# EAGLE board Qwiic_RFID_Tag-Panel (EAGLE 9.6.2)
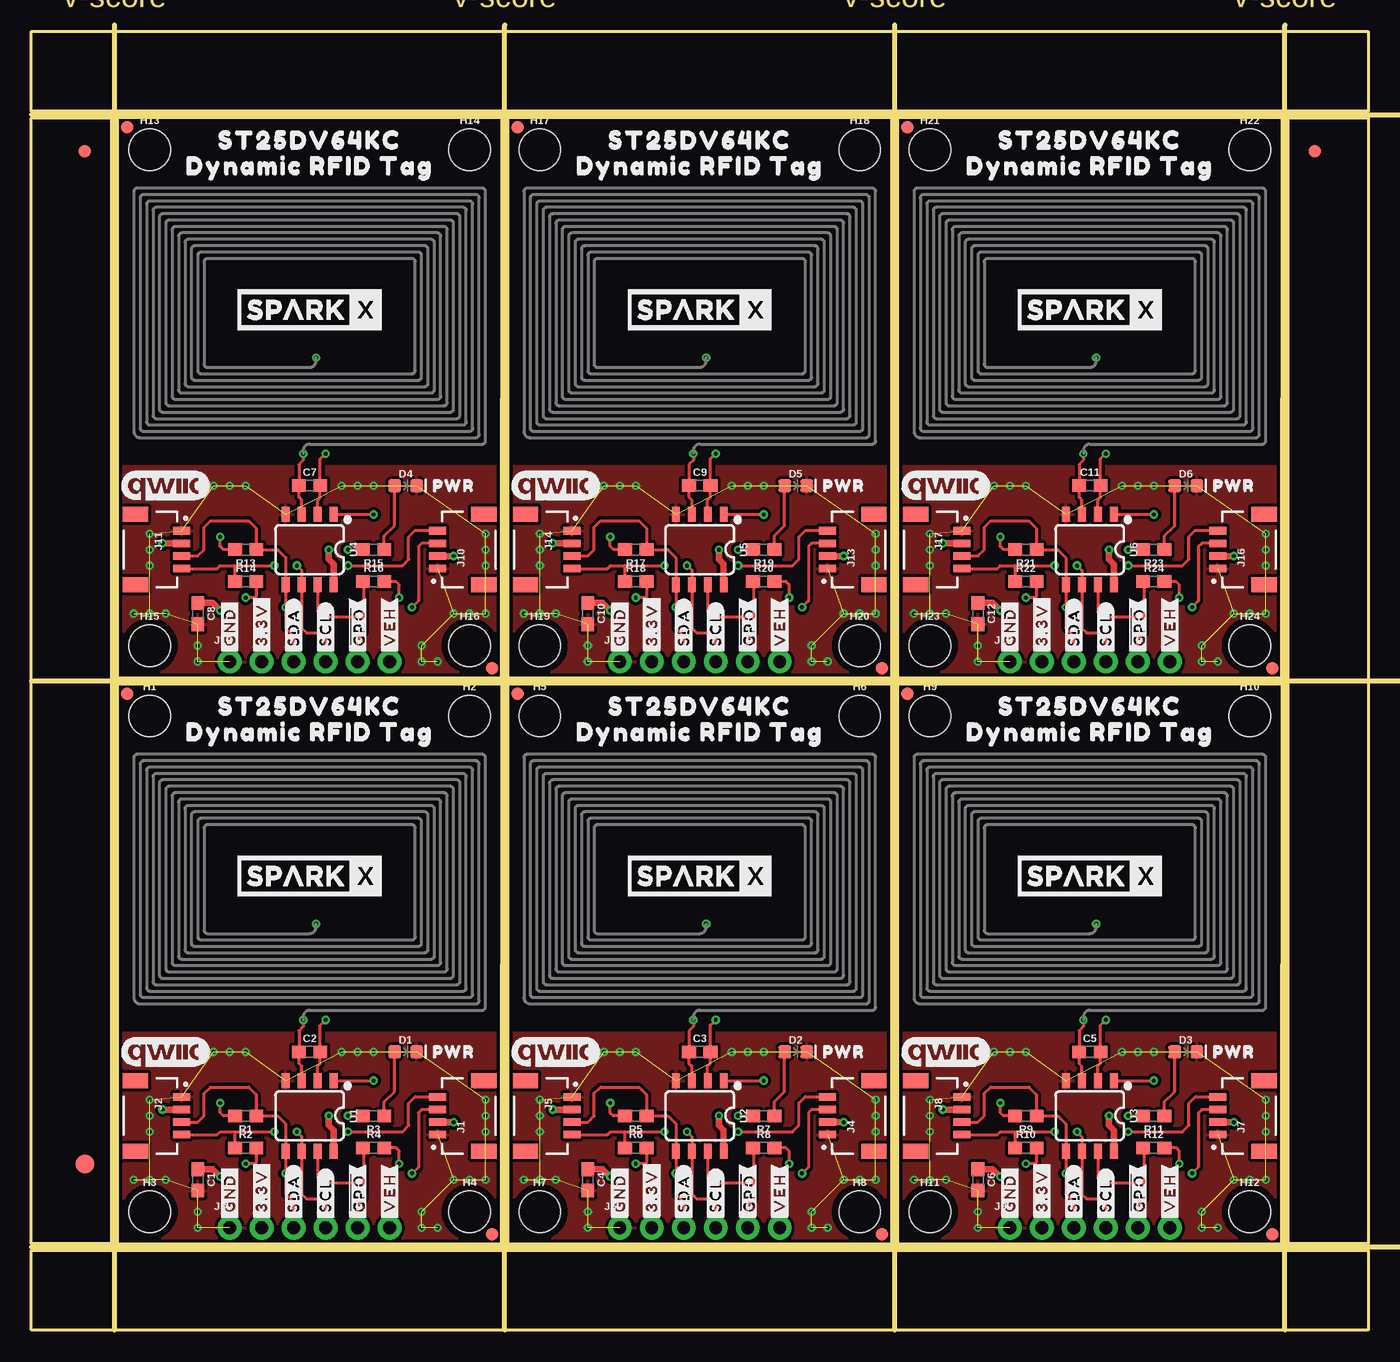
[diagram p0: board, top side]
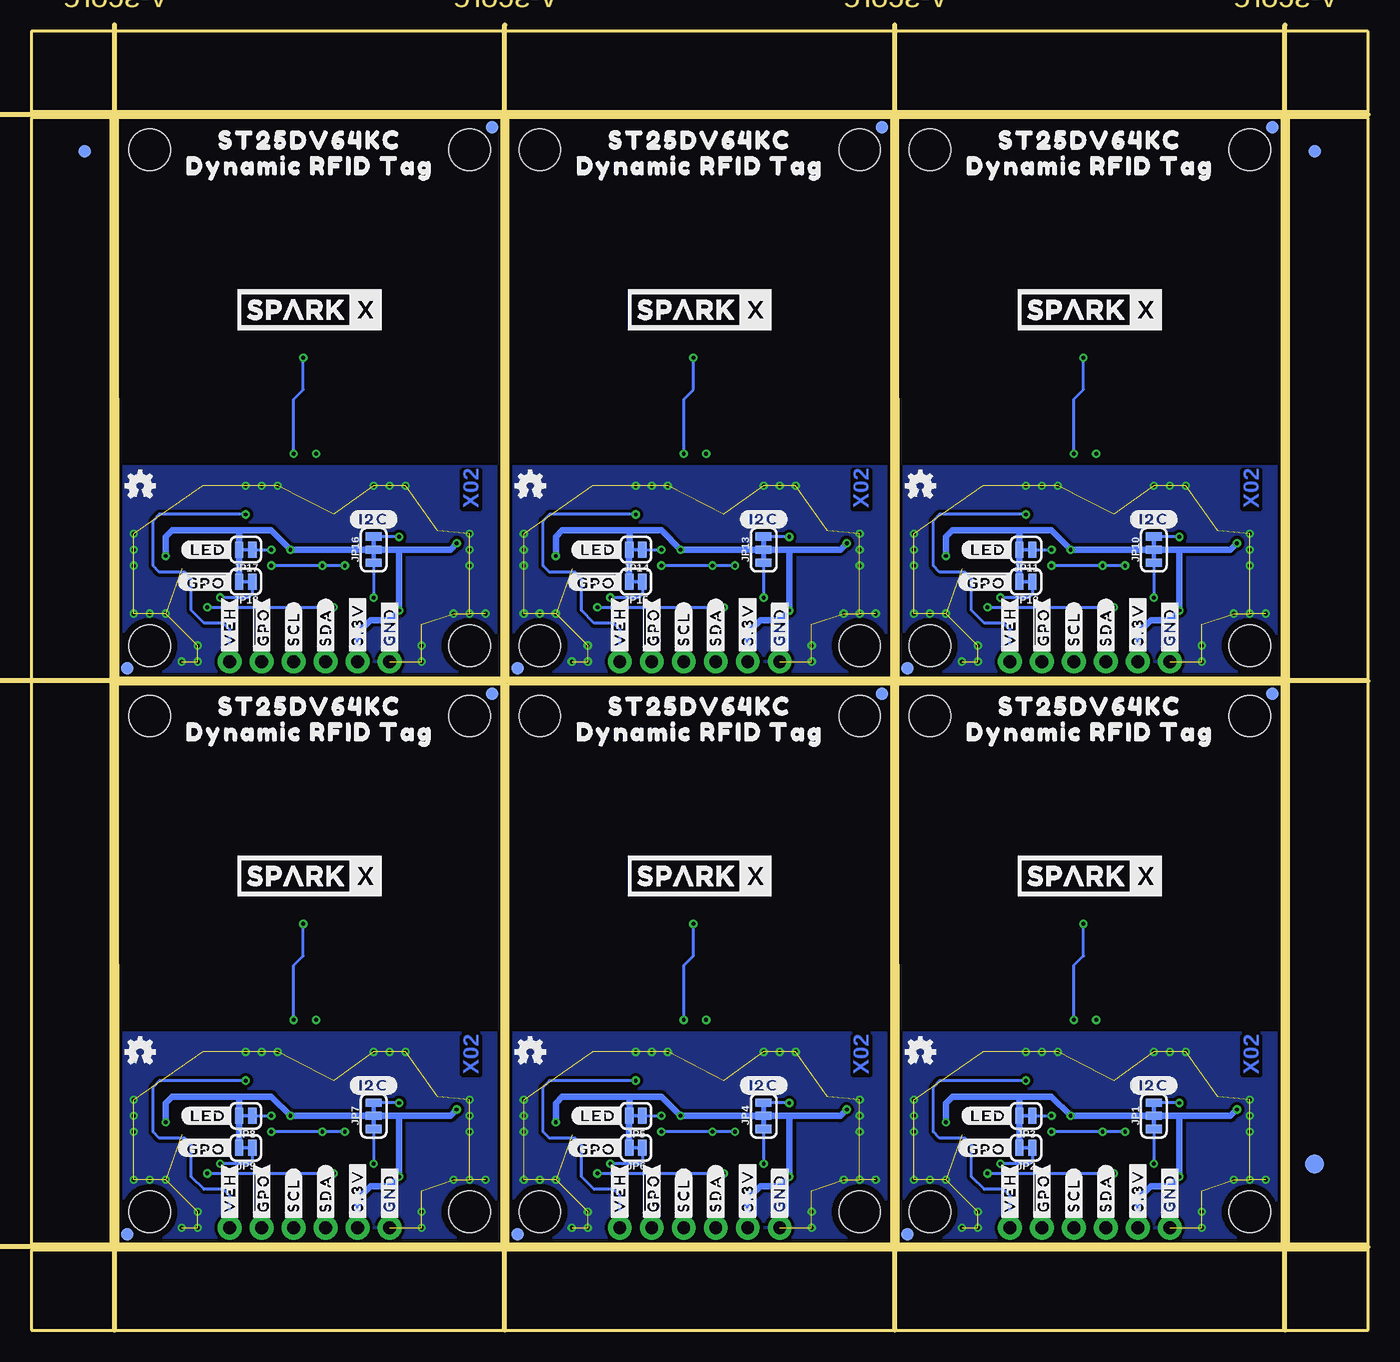
[diagram p1: board, bottom side, seen from below]

Size 106.17 x 103.12 mm. Coordinates in mm from the lower left corner, seen from the top.
Outline: 6.86,6.86 37.32,6.86 37.34,51.31 6.86,51.31 6.86,6.86
Outline: 37.85,6.86 68.31,6.86 68.33,51.31 37.85,51.31 37.85,6.86
Outline: 68.83,6.86 99.29,6.86 99.31,51.31 68.83,51.31 68.83,6.86
Outline: 6.86,51.82 37.32,51.82 37.34,96.27 6.86,96.27 6.86,51.82
Outline: 37.85,51.82 68.31,51.82 68.33,96.27 37.85,96.27 37.85,51.82
Outline: 68.83,51.82 99.29,51.82 99.31,96.27 68.83,96.27 68.83,51.82
Outline: 0,6.35 106.17,6.35 106.17,0 0,0 0,6.35
Outline: 99.82,96.27 106.17,96.27 106.17,6.86 99.82,6.86 99.82,96.27
Outline: 0,103.12 106.17,103.12 106.17,96.77 0,96.77 0,103.12
Outline: 0,96.27 6.35,96.27 6.35,6.86 0,6.86 0,96.27
Copper layers (1*16): Top 0.035mm / dielectric 1.5mm / Bottom 0.035mm
Design rules "Qwiic_RFID_Tag": minimum track width 7mil, minimum drill 0.3mm, track to track 7mil, track to pad 7mil, pad to pad 7mil, via to via 7mil, smd to smd 7mil, copper to edge 7mil, drill to drill 7mil, minimum pad ring 7mil, minimum via ring 7mil, stop-mask expansion 4mil, vias tented up to drill 25mil, thermal gap 10mil
Milling: 7 lines

## Footprints (pad centres in the part's own frame; a part is rotated, then mirrored left to right if it is on the bottom)
0603 = smd 1.1 x 1: 1 -0.85,0; 2 0.85,0
LED-0603 = smd 1 x 1: A -0.877,0; C 0.877,0
FIDUCIAL-1X2 = smd 1 x 1: 1 0,0
FIDUCIAL-1.5X3 = smd 1.5 x 1.5: 1 0,0
STAND-OFF = hole 3.302: 0,0
JST04_1MM_RA = smd 0.6 x 1.35: 1 -1.5,0; 2 -0.5,0; 3 0.5,0; 4 1.5,0 | smd 1.2 x 2: NC1 2.8,-3.675; NC2 -2.8,-3.675
1X06_NO_SILK = drill 1.016 pad 1.88: 1 0,0; 2 2.54,0; 3 5.08,0; 4 7.62,0; 5 10.16,0; 6 12.7,0
SMT-JUMPER_3_2-NC_TRACE_SILK = smd 0.66 x 1.27: 1 -1.041,0; 2 0,0; 3 1.041,0
SMT-JUMPER_2_NC_TRACE_SILK = smd 0.66 x 1.27: 1 -0.521,0; 2 0.521,0
PCB_4UH_INDUCTOR = drill 0.305 pad 0.61: IN1 0.508,7.62; IN2 -0.508,0
SO08 = smd 0.6 x 1.2: 1 -1.905,-2.8; 2 -0.635,-2.8; 3 0.635,-2.8; 4 1.905,-2.8; 5 1.905,2.8; 6 0.635,2.8; 7 -0.635,2.8; 8 -1.905,2.8

## Placement (x,y rotation side)
C1  0.1uF  [0603]  13.21,11.94 270 top
C2  4.7pF  [0603]  22.1,22.1 0 top
C3  4.7pF  [0603]  53.09,22.1 0 top
C4  0.1uF  [0603]  44.2,11.94 270 top
C5  4.7pF  [0603]  84.07,22.1 0 top
C6  0.1uF  [0603]  75.18,11.94 270 top
C7  4.7pF  [0603]  22.1,67.06 0 top
C8  0.1uF  [0603]  13.21,56.9 270 top
C9  4.7pF  [0603]  53.09,67.06 0 top
C10  0.1uF  [0603]  44.2,56.9 270 top
C11  4.7pF  [0603]  84.07,67.06 0 top
C12  0.1uF  [0603]  75.18,56.9 270 top
D1  RED  [LED-0603]  29.72,22.1 0 top
D2  RED  [LED-0603]  60.71,22.1 0 top
D3  RED  [LED-0603]  91.69,22.1 0 top
D4  RED  [LED-0603]  29.72,67.06 0 top
D5  RED  [LED-0603]  60.71,67.06 0 top
D6  RED  [LED-0603]  91.69,67.06 0 top
E$1  [FIDUCIAL-1X2]  4.23,93.6 0 top
E$2  [FIDUCIAL-1X2]  4.23,93.6 0 bottom
E$3  [FIDUCIAL-1X2]  101.94,93.6 0 top
E$4  [FIDUCIAL-1X2]  101.94,93.6 0 bottom
E$5  [FIDUCIAL-1.5X3]  4.23,13.21 0 top
E$6  [FIDUCIAL-1.5X3]  4.23,13.21 0 bottom
FD1  FIDUCIAL1X2  [FIDUCIAL-1X2]  7.62,50.55 0 bottom
FD2  FIDUCIAL1X2  [FIDUCIAL-1X2]  7.62,50.55 0 top
FD3  FIDUCIAL1X2  [FIDUCIAL-1X2]  36.58,7.62 0 bottom
FD4  FIDUCIAL1X2  [FIDUCIAL-1X2]  36.58,7.62 0 top
FD5  FIDUCIAL1X2  [FIDUCIAL-1X2]  38.61,50.55 0 bottom
FD6  FIDUCIAL1X2  [FIDUCIAL-1X2]  38.61,50.55 0 top
FD7  FIDUCIAL1X2  [FIDUCIAL-1X2]  67.56,7.62 0 bottom
FD8  FIDUCIAL1X2  [FIDUCIAL-1X2]  67.56,7.62 0 top
FD9  FIDUCIAL1X2  [FIDUCIAL-1X2]  69.6,50.55 0 bottom
FD10  FIDUCIAL1X2  [FIDUCIAL-1X2]  69.6,50.55 0 top
FD11  FIDUCIAL1X2  [FIDUCIAL-1X2]  98.55,7.62 0 bottom
FD12  FIDUCIAL1X2  [FIDUCIAL-1X2]  98.55,7.62 0 top
FD13  FIDUCIAL1X2  [FIDUCIAL-1X2]  7.62,95.5 0 bottom
FD14  FIDUCIAL1X2  [FIDUCIAL-1X2]  7.62,95.5 0 top
FD15  FIDUCIAL1X2  [FIDUCIAL-1X2]  36.58,52.58 0 bottom
FD16  FIDUCIAL1X2  [FIDUCIAL-1X2]  36.58,52.58 0 top
FD17  FIDUCIAL1X2  [FIDUCIAL-1X2]  38.61,95.5 0 bottom
FD18  FIDUCIAL1X2  [FIDUCIAL-1X2]  38.61,95.5 0 top
FD19  FIDUCIAL1X2  [FIDUCIAL-1X2]  67.56,52.58 0 bottom
FD20  FIDUCIAL1X2  [FIDUCIAL-1X2]  67.56,52.58 0 top
FD21  FIDUCIAL1X2  [FIDUCIAL-1X2]  69.6,95.5 0 bottom
FD22  FIDUCIAL1X2  [FIDUCIAL-1X2]  69.6,95.5 0 top
FD23  FIDUCIAL1X2  [FIDUCIAL-1X2]  98.55,52.58 0 bottom
FD24  FIDUCIAL1X2  [FIDUCIAL-1X2]  98.55,52.58 0 top
FRAME1  FRAME-LETTERNO_PACKAGE  [DUMMY]  6.86,6.86 0 top
FRAME2  FRAME-LETTERNO_PACKAGE  [DUMMY]  37.85,6.86 0 top
FRAME3  FRAME-LETTERNO_PACKAGE  [DUMMY]  68.83,6.86 0 top
FRAME4  FRAME-LETTERNO_PACKAGE  [DUMMY]  6.86,51.82 0 top
FRAME5  FRAME-LETTERNO_PACKAGE  [DUMMY]  37.85,51.82 0 top
FRAME6  FRAME-LETTERNO_PACKAGE  [DUMMY]  68.83,51.82 0 top
H1  STAND-OFF  [STAND-OFF]  9.4,48.77 0 top
H2  STAND-OFF  [STAND-OFF]  34.8,48.77 0 top
H3  STAND-OFF  [STAND-OFF]  9.4,9.4 0 top
H4  STAND-OFF  [STAND-OFF]  34.8,9.4 0 top
H5  STAND-OFF  [STAND-OFF]  40.39,48.77 0 top
H6  STAND-OFF  [STAND-OFF]  65.79,48.77 0 top
H7  STAND-OFF  [STAND-OFF]  40.39,9.4 0 top
H8  STAND-OFF  [STAND-OFF]  65.79,9.4 0 top
H9  STAND-OFF  [STAND-OFF]  71.37,48.77 0 top
H10  STAND-OFF  [STAND-OFF]  96.77,48.77 0 top
H11  STAND-OFF  [STAND-OFF]  71.37,9.4 0 top
H12  STAND-OFF  [STAND-OFF]  96.77,9.4 0 top
H13  STAND-OFF  [STAND-OFF]  9.4,93.73 0 top
H14  STAND-OFF  [STAND-OFF]  34.8,93.73 0 top
H15  STAND-OFF  [STAND-OFF]  9.4,54.36 0 top
H16  STAND-OFF  [STAND-OFF]  34.8,54.36 0 top
H17  STAND-OFF  [STAND-OFF]  40.39,93.73 0 top
H18  STAND-OFF  [STAND-OFF]  65.79,93.73 0 top
H19  STAND-OFF  [STAND-OFF]  40.39,54.36 0 top
H20  STAND-OFF  [STAND-OFF]  65.79,54.36 0 top
H21  STAND-OFF  [STAND-OFF]  71.37,93.73 0 top
H22  STAND-OFF  [STAND-OFF]  96.77,93.73 0 top
H23  STAND-OFF  [STAND-OFF]  71.37,54.36 0 top
H24  STAND-OFF  [STAND-OFF]  96.77,54.36 0 top
J1  Qwiic  [JST04_1MM_RA]  32.26,17.02 90 top
J2  Qwiic  [JST04_1MM_RA]  11.94,17.02 270 top
J3  [1X06_NO_SILK]  15.75,8.13 0 top
J4  Qwiic  [JST04_1MM_RA]  63.25,17.02 90 top
J5  Qwiic  [JST04_1MM_RA]  42.93,17.02 270 top
J6  [1X06_NO_SILK]  46.74,8.13 0 top
J7  Qwiic  [JST04_1MM_RA]  94.23,17.02 90 top
J8  Qwiic  [JST04_1MM_RA]  73.91,17.02 270 top
J9  [1X06_NO_SILK]  77.72,8.13 0 top
J10  Qwiic  [JST04_1MM_RA]  32.26,61.98 90 top
J11  Qwiic  [JST04_1MM_RA]  11.94,61.98 270 top
J12  [1X06_NO_SILK]  15.75,53.09 0 top
J13  Qwiic  [JST04_1MM_RA]  63.25,61.98 90 top
J14  Qwiic  [JST04_1MM_RA]  42.93,61.98 270 top
J15  [1X06_NO_SILK]  46.74,53.09 0 top
J16  Qwiic  [JST04_1MM_RA]  94.23,61.98 90 top
J17  Qwiic  [JST04_1MM_RA]  73.91,61.98 270 top
J18  [1X06_NO_SILK]  77.72,53.09 0 top
JP1  JUMPER-SMT_3_2-NC_TRACE_SILK  [SMT-JUMPER_3_2-NC_TRACE_SILK]  17.02,17.02 90 bottom
JP2  JUMPER-SMT_2_NC_TRACE_SILK  [SMT-JUMPER_2_NC_TRACE_SILK]  27.18,14.48 180 bottom
JP3  JUMPER-SMT_2_NC_TRACE_SILK  [SMT-JUMPER_2_NC_TRACE_SILK]  27.18,17.02 180 bottom
JP4  JUMPER-SMT_3_2-NC_TRACE_SILK  [SMT-JUMPER_3_2-NC_TRACE_SILK]  48.01,17.02 90 bottom
JP5  JUMPER-SMT_2_NC_TRACE_SILK  [SMT-JUMPER_2_NC_TRACE_SILK]  58.17,17.02 180 bottom
JP6  JUMPER-SMT_2_NC_TRACE_SILK  [SMT-JUMPER_2_NC_TRACE_SILK]  58.17,14.48 180 bottom
JP7  JUMPER-SMT_3_2-NC_TRACE_SILK  [SMT-JUMPER_3_2-NC_TRACE_SILK]  78.99,17.02 90 bottom
JP8  JUMPER-SMT_2_NC_TRACE_SILK  [SMT-JUMPER_2_NC_TRACE_SILK]  89.15,17.02 180 bottom
JP9  JUMPER-SMT_2_NC_TRACE_SILK  [SMT-JUMPER_2_NC_TRACE_SILK]  89.15,14.48 180 bottom
JP10  JUMPER-SMT_3_2-NC_TRACE_SILK  [SMT-JUMPER_3_2-NC_TRACE_SILK]  17.02,61.98 90 bottom
JP11  JUMPER-SMT_2_NC_TRACE_SILK  [SMT-JUMPER_2_NC_TRACE_SILK]  27.18,61.98 180 bottom
JP12  JUMPER-SMT_2_NC_TRACE_SILK  [SMT-JUMPER_2_NC_TRACE_SILK]  27.18,59.44 180 bottom
JP13  JUMPER-SMT_3_2-NC_TRACE_SILK  [SMT-JUMPER_3_2-NC_TRACE_SILK]  48.01,61.98 90 bottom
JP14  JUMPER-SMT_2_NC_TRACE_SILK  [SMT-JUMPER_2_NC_TRACE_SILK]  58.17,61.98 180 bottom
JP15  JUMPER-SMT_2_NC_TRACE_SILK  [SMT-JUMPER_2_NC_TRACE_SILK]  58.17,59.44 180 bottom
JP16  JUMPER-SMT_3_2-NC_TRACE_SILK  [SMT-JUMPER_3_2-NC_TRACE_SILK]  78.99,61.98 90 bottom
JP17  JUMPER-SMT_2_NC_TRACE_SILK  [SMT-JUMPER_2_NC_TRACE_SILK]  89.15,61.98 180 bottom
JP18  JUMPER-SMT_2_NC_TRACE_SILK  [SMT-JUMPER_2_NC_TRACE_SILK]  89.15,59.44 180 bottom
L1  PCB_4UH_INDUCTOR  [PCB_4UH_INDUCTOR]  22.1,24.64 0 top
L2  PCB_4UH_INDUCTOR  [PCB_4UH_INDUCTOR]  53.09,24.64 0 top
L3  PCB_4UH_INDUCTOR  [PCB_4UH_INDUCTOR]  84.07,24.64 0 top
L4  PCB_4UH_INDUCTOR  [PCB_4UH_INDUCTOR]  22.1,69.6 0 top
L5  PCB_4UH_INDUCTOR  [PCB_4UH_INDUCTOR]  53.09,69.6 0 top
L6  PCB_4UH_INDUCTOR  [PCB_4UH_INDUCTOR]  84.07,69.6 0 top
LOGO1  OSHW-LOGOMINI  [OSHW-LOGO-MINI]  35.56,22.1 0 bottom
LOGO2  OSHW-LOGOMINI  [OSHW-LOGO-MINI]  66.55,22.1 0 bottom
LOGO3  QWIIC_LOGO_7MM  [QWIIC_7MM]  10.67,22.1 0 top
LOGO4  QWIIC_LOGO_7MM  [QWIIC_7MM]  41.66,22.1 0 top
LOGO5  OSHW-LOGOMINI  [OSHW-LOGO-MINI]  97.54,22.1 0 bottom
LOGO6  QWIIC_LOGO_7MM  [QWIIC_7MM]  72.64,22.1 0 top
LOGO7  OSHW-LOGOMINI  [OSHW-LOGO-MINI]  35.56,67.06 0 bottom
LOGO8  QWIIC_LOGO_7MM  [QWIIC_7MM]  10.67,67.06 0 top
LOGO9  OSHW-LOGOMINI  [OSHW-LOGO-MINI]  66.55,67.06 0 bottom
LOGO10  QWIIC_LOGO_7MM  [QWIIC_7MM]  41.66,67.06 0 top
LOGO11  OSHW-LOGOMINI  [OSHW-LOGO-MINI]  97.54,67.06 0 bottom
LOGO12  QWIIC_LOGO_7MM  [QWIIC_7MM]  72.64,67.06 0 top
R1  2.2k  [0603]  17.02,17.02 180 top
R2  2.2k  [0603]  17.02,14.48 0 top
R3  1k  [0603]  27.18,17.02 180 top
R4  10k  [0603]  27.18,14.48 0 top
R5  2.2k  [0603]  48.01,17.02 180 top
R6  2.2k  [0603]  48.01,14.48 0 top
R7  1k  [0603]  58.17,17.02 180 top
R8  10k  [0603]  58.17,14.48 0 top
R9  2.2k  [0603]  78.99,17.02 180 top
R10  2.2k  [0603]  78.99,14.48 0 top
R11  1k  [0603]  89.15,17.02 180 top
R12  10k  [0603]  89.15,14.48 0 top
R13  2.2k  [0603]  17.02,61.98 180 top
R14  2.2k  [0603]  17.02,59.44 0 top
R15  1k  [0603]  27.18,61.98 180 top
R16  10k  [0603]  27.18,59.44 0 top
R17  2.2k  [0603]  48.01,61.98 180 top
R18  2.2k  [0603]  48.01,59.44 0 top
R19  1k  [0603]  58.17,61.98 180 top
R20  10k  [0603]  58.17,59.44 0 top
R21  2.2k  [0603]  78.99,61.98 180 top
R22  2.2k  [0603]  78.99,59.44 0 top
R23  1k  [0603]  89.15,61.98 180 top
R24  10k  [0603]  89.15,59.44 0 top
U1  ST25DV64KC  [SO08]  22.1,17.02 180 top
U2  ST25DV64KC  [SO08]  53.09,17.02 180 top
U3  ST25DV64KC  [SO08]  84.07,17.02 180 top
U4  ST25DV64KC  [SO08]  22.1,61.98 180 top
U5  ST25DV64KC  [SO08]  53.09,61.98 180 top
U6  ST25DV64KC  [SO08]  84.07,61.98 180 top
U$1  SPARKX-LOGO5  [SPARKX-LARGE]  22.1,36.07 0 top
U$2  SPARKX-LOGO5  [SPARKX-LARGE]  22.1,36.07 0 bottom
U$3  [#3#3V#0]  18.29,8.64 90 top
U$4  [#GND#4]  15.75,8.64 90 top
U$5  [#SDA#5]  20.83,8.64 90 top
U$6  [#SCL#6]  23.37,8.64 90 top
U$7  [##GPO##8]  25.91,8.64 90 top
U$8  [#VEH#7]  28.45,8.64 90 top
U$9  [PWR11]  33.53,22.1 0 top
U$10  [DYNAMIC_RFID_TAG0]  22.1,47.5 0 top
U$11  [DYNAMIC_RFID_TAG0]  22.1,47.5 0 bottom
U$12  SPARKX-LOGO5  [SPARKX-LARGE]  53.09,36.07 0 top
U$13  [ST25DV64KC5984]  22.1,49.53 0 top
U$14  SPARKX-LOGO5  [SPARKX-LARGE]  53.09,36.07 0 bottom
U$15  [#I2C#11]  17.02,19.43 0 bottom
U$16  [##GPO##9]  28.07,14.48 0 bottom
U$17  [#LED#10]  28.07,17.02 0 bottom
U$18  [#GND#4]  15.75,8.64 90 bottom
U$19  [#3#3V#0]  18.29,8.64 90 bottom
U$20  [#SDA#5]  20.83,8.64 90 bottom
U$21  [#SCL#6]  23.37,8.64 90 bottom
U$22  [##GPO##8]  25.91,8.64 90 bottom
U$23  [#VEH#7]  28.45,8.64 90 bottom
U$24  [ST25DV64KC5984]  22.1,49.53 0 bottom
U$25  [#3#3V#0]  49.28,8.64 90 top
U$26  [#GND#4]  46.74,8.64 90 top
U$27  [#SDA#5]  51.82,8.64 90 top
U$28  [#SCL#6]  54.36,8.64 90 top
U$29  [##GPO##8]  56.9,8.64 90 top
U$30  [#VEH#7]  59.44,8.64 90 top
U$31  [PWR11]  64.52,22.1 0 top
U$32  [#I2C#11]  48.01,19.43 0 bottom
U$33  [##GPO##9]  59.05,14.48 0 bottom
U$34  [#LED#10]  59.05,17.02 0 bottom
U$35  [#GND#4]  46.74,8.64 90 bottom
U$36  [#3#3V#0]  49.28,8.64 90 bottom
U$37  [#SDA#5]  51.82,8.64 90 bottom
U$38  [#SCL#6]  54.36,8.64 90 bottom
U$39  [##GPO##8]  56.9,8.64 90 bottom
U$40  [#VEH#7]  59.44,8.64 90 bottom
U$41  [ST25DV64KC5984]  53.09,49.53 0 top
U$42  [ST25DV64KC5984]  53.09,49.53 0 bottom
U$43  [DYNAMIC_RFID_TAG0]  53.09,47.5 0 top
U$44  [DYNAMIC_RFID_TAG0]  53.09,47.5 0 bottom
U$45  SPARKX-LOGO5  [SPARKX-LARGE]  84.07,36.07 0 top
U$46  SPARKX-LOGO5  [SPARKX-LARGE]  84.07,36.07 0 bottom
U$47  [#3#3V#0]  80.26,8.64 90 top
U$48  [#GND#4]  77.72,8.64 90 top
U$49  [#SDA#5]  82.8,8.64 90 top
U$50  [#SCL#6]  85.34,8.64 90 top
U$51  [##GPO##8]  87.88,8.64 90 top
U$52  [#VEH#7]  90.42,8.64 90 top
U$53  [PWR11]  95.5,22.1 0 top
U$54  [#I2C#11]  78.99,19.43 0 bottom
U$55  [##GPO##9]  90.04,14.48 0 bottom
U$56  [#LED#10]  90.04,17.02 0 bottom
U$57  [#GND#4]  77.72,8.64 90 bottom
U$58  [#3#3V#0]  80.26,8.64 90 bottom
U$59  [#SDA#5]  82.8,8.64 90 bottom
U$60  [#SCL#6]  85.34,8.64 90 bottom
U$61  [##GPO##8]  87.88,8.64 90 bottom
U$62  [#VEH#7]  90.42,8.64 90 bottom
U$63  [ST25DV64KC5984]  84.07,49.53 0 top
U$64  [ST25DV64KC5984]  84.07,49.53 0 bottom
U$65  [DYNAMIC_RFID_TAG0]  84.07,47.5 0 top
U$66  [DYNAMIC_RFID_TAG0]  84.07,47.5 0 bottom
U$67  SPARKX-LOGO5  [SPARKX-LARGE]  22.1,81.03 0 top
U$68  SPARKX-LOGO5  [SPARKX-LARGE]  22.1,81.03 0 bottom
U$69  [#3#3V#0]  18.29,53.59 90 top
U$70  [#GND#4]  15.75,53.59 90 top
U$71  [#SDA#5]  20.83,53.59 90 top
U$72  [#SCL#6]  23.37,53.59 90 top
U$73  [##GPO##8]  25.91,53.59 90 top
U$74  [#VEH#7]  28.45,53.59 90 top
U$75  [PWR11]  33.53,67.06 0 top
U$76  [#I2C#11]  17.02,64.39 0 bottom
U$77  [##GPO##9]  28.07,59.44 0 bottom
U$78  [#LED#10]  28.07,61.98 0 bottom
U$79  [#GND#4]  15.75,53.59 90 bottom
U$80  [#3#3V#0]  18.29,53.59 90 bottom
U$81  [#SDA#5]  20.83,53.59 90 bottom
U$82  [#SCL#6]  23.37,53.59 90 bottom
U$83  [##GPO##8]  25.91,53.59 90 bottom
U$84  [#VEH#7]  28.45,53.59 90 bottom
U$85  [ST25DV64KC5984]  22.1,94.49 0 top
U$86  [ST25DV64KC5984]  22.1,94.49 0 bottom
U$87  [DYNAMIC_RFID_TAG0]  22.1,92.46 0 top
U$88  [DYNAMIC_RFID_TAG0]  22.1,92.46 0 bottom
U$89  SPARKX-LOGO5  [SPARKX-LARGE]  53.09,81.03 0 top
U$90  SPARKX-LOGO5  [SPARKX-LARGE]  53.09,81.03 0 bottom
U$91  [#3#3V#0]  49.28,53.59 90 top
U$92  [#GND#4]  46.74,53.59 90 top
U$93  [#SDA#5]  51.82,53.59 90 top
U$94  [#SCL#6]  54.36,53.59 90 top
U$95  [##GPO##8]  56.9,53.59 90 top
U$96  [#VEH#7]  59.44,53.59 90 top
U$97  [PWR11]  64.52,67.06 0 top
U$98  [#I2C#11]  48.01,64.39 0 bottom
U$99  [##GPO##9]  59.05,59.44 0 bottom
U$100  [#LED#10]  59.05,61.98 0 bottom
U$101  [#GND#4]  46.74,53.59 90 bottom
U$102  [#3#3V#0]  49.28,53.59 90 bottom
U$103  [#SDA#5]  51.82,53.59 90 bottom
U$104  [#SCL#6]  54.36,53.59 90 bottom
U$105  [##GPO##8]  56.9,53.59 90 bottom
U$106  [#VEH#7]  59.44,53.59 90 bottom
U$107  [ST25DV64KC5984]  53.09,94.49 0 top
U$108  [ST25DV64KC5984]  53.09,94.49 0 bottom
U$109  [DYNAMIC_RFID_TAG0]  53.09,92.46 0 top
U$110  [DYNAMIC_RFID_TAG0]  53.09,92.46 0 bottom
U$111  SPARKX-LOGO5  [SPARKX-LARGE]  84.07,81.03 0 top
U$112  SPARKX-LOGO5  [SPARKX-LARGE]  84.07,81.03 0 bottom
U$113  [#3#3V#0]  80.26,53.59 90 top
U$114  [#GND#4]  77.72,53.59 90 top
U$115  [#SDA#5]  82.8,53.59 90 top
U$116  [#SCL#6]  85.34,53.59 90 top
U$117  [##GPO##8]  87.88,53.59 90 top
U$118  [#VEH#7]  90.42,53.59 90 top
U$119  [PWR11]  95.5,67.06 0 top
U$120  [#I2C#11]  78.99,64.39 0 bottom
U$121  [##GPO##9]  90.04,59.44 0 bottom
U$122  [#LED#10]  90.04,61.98 0 bottom
U$123  [#GND#4]  77.72,53.59 90 bottom
U$124  [#3#3V#0]  80.26,53.59 90 bottom
U$125  [#SDA#5]  82.8,53.59 90 bottom
U$126  [#SCL#6]  85.34,53.59 90 bottom
U$127  [##GPO##8]  87.88,53.59 90 bottom
U$128  [#VEH#7]  90.42,53.59 90 bottom
U$129  [ST25DV64KC5984]  84.07,94.49 0 top
U$130  [ST25DV64KC5984]  84.07,94.49 0 bottom
U$131  [DYNAMIC_RFID_TAG0]  84.07,92.46 0 top
U$132  [DYNAMIC_RFID_TAG0]  84.07,92.46 0 bottom

## Library data of the parts
C1 C4 C6 C8 C10 C12 = SparkFun-Capacitors; PROD_ID: CAP-00810
C2 C3 C5 C7 C9 C11 = SparkFun-Capacitors; PROD_ID: CAP-07880
D1-D6 = SparkFun-LED; PROD_ID: DIO-00819
E$1-E$4 FD1-FD24 LOGO1-LOGO12 = SparkFun-Aesthetics
E$5 E$6 = SparkFun-Retired
FRAME1-FRAME6 = SparkFun-Aesthetics; DESIGNER: Ricardo Ramos; REV: X02; VERSION: x01
H1-H24 = SparkFun-Hardware
J1 J2 J4 J5 J7 J8 J10 J11 J13 J14 J16 J17 = SparkFun-Connectors; PROD_ID: CONN-13694
J3 J6 J9 J12 J15 J18 = SparkFun-Connectors; PROD_ID: CONN-08437
JP1-JP18 = SparkFun-Jumpers
L1-L6 = SparkFun-Coils
R1 R2 R5 R6 R9 R10 R13 R14 R17 R18 R21 R22 = SparkFun-Resistors; PROD_ID: RES-08272
R3 R7 R11 R15 R19 R23 = SparkFun-Resistors; PROD_ID: RES-07856
R4 R8 R12 R16 R20 R24 = SparkFun-Resistors; PROD_ID: RES-00824
U1-U6 = SparkFun-RF; PROD_ID: IC-16315
U$1 U$2 U$12 U$14 U$45 U$46 U$67 U$68 U$89 U$90 U$111 U$112 = SparkX
U$3-U$11 U$15-U$23 U$25-U$40 U$43 U$44 U$47-U$62 U$65 U$66 U$69-U$84 U$87 U$88 U$91-U$106 U$109 U$110 U$113-U$128 U$131 U$132 = output
U$13 U$24 U$41 U$42 U$63 U$64 U$85 U$86 U$107 U$108 U$129 U$130 = SER

## Nets
3.3V: C1.1 J1.2 J2.2 J3.2 JP1.2 JP2.2 JP3.2 U1.8
3.3V1: C4.1 J4.2 J5.2 J6.2 JP4.2 JP5.2 JP6.2 U2.8
3.3V2: C6.1 J7.2 J8.2 J9.2 JP7.2 JP8.2 JP9.2 U3.8
3.3V3: C8.1 J10.2 J11.2 J12.2 JP10.2 JP11.2 JP12.2 U4.8
3.3V4: C10.1 J13.2 J14.2 J15.2 JP13.2 JP14.2 JP15.2 U5.8
3.3V5: C12.1 J16.2 J17.2 J18.2 JP16.2 JP17.2 JP18.2 U6.8
!GPO!: J3.5 R4.1 U1.7
!GPO!1: J6.5 R8.1 U2.7
!GPO!2: J9.5 R12.1 U3.7
!GPO!3: J12.5 R16.1 U4.7
!GPO!4: J15.5 R20.1 U5.7
!GPO!5: J18.5 R24.1 U6.7
AC0: C2.2 L1.IN1 U1.2
AC1: C2.1 L1.IN2 U1.3
AC2: C3.2 L2.IN1 U2.2
AC3: C3.1 L2.IN2 U2.3
AC4: C5.2 L3.IN1 U3.2
AC5: C5.1 L3.IN2 U3.3
AC6: C7.2 L4.IN1 U4.2
AC7: C7.1 L4.IN2 U4.3
AC8: C9.2 L5.IN1 U5.2
AC9: C9.1 L5.IN2 U5.3
AC10: C11.2 L6.IN1 U6.2
AC11: C11.1 L6.IN2 U6.3
GND: C1.2 D1.C J1.1 J2.1 J3.1 U1.4
GND1: C4.2 D2.C J4.1 J5.1 J6.1 U2.4
GND2: C6.2 D3.C J7.1 J8.1 J9.1 U3.4
GND3: C8.2 D4.C J10.1 J11.1 J12.1 U4.4
GND4: C10.2 D5.C J13.1 J14.1 J15.1 U5.4
GND5: C12.2 D6.C J16.1 J17.1 J18.1 U6.4
N$1: JP3.1 R3.2
N$2: JP1.3 R1.2
N$3: JP1.1 R2.2
N$4: D1.A R3.1
N$5: JP2.1 R4.2
N$6: JP4.3 R5.2
N$7: JP4.1 R6.2
N$8: JP5.1 R7.2
N$9: D2.A R7.1
N$10: JP6.1 R8.2
N$11: JP7.3 R9.2
N$12: JP7.1 R10.2
N$13: JP8.1 R11.2
N$14: D3.A R11.1
N$15: JP9.1 R12.2
N$16: JP10.3 R13.2
N$17: JP10.1 R14.2
N$18: JP11.1 R15.2
N$19: D4.A R15.1
N$20: JP12.1 R16.2
N$21: JP13.3 R17.2
N$22: JP13.1 R18.2
N$23: JP14.1 R19.2
N$24: D5.A R19.1
N$25: JP15.1 R20.2
N$26: JP16.3 R21.2
N$27: JP16.1 R22.2
N$28: JP17.1 R23.2
N$29: D6.A R23.1
N$30: JP18.1 R24.2
SCL: J1.4 J2.4 J3.4 R2.1 U1.6
SCL1: J4.4 J5.4 J6.4 R6.1 U2.6
SCL2: J7.4 J8.4 J9.4 R10.1 U3.6
SCL3: J10.4 J11.4 J12.4 R14.1 U4.6
SCL4: J13.4 J14.4 J15.4 R18.1 U5.6
SCL5: J16.4 J17.4 J18.4 R22.1 U6.6
SDA: J1.3 J2.3 J3.3 R1.1 U1.5
SDA1: J4.3 J5.3 J6.3 R5.1 U2.5
SDA2: J7.3 J8.3 J9.3 R9.1 U3.5
SDA3: J10.3 J11.3 J12.3 R13.1 U4.5
SDA4: J13.3 J14.3 J15.3 R17.1 U5.5
SDA5: J16.3 J17.3 J18.3 R21.1 U6.5
VEH: J3.6 U1.1
VEH1: J6.6 U2.1
VEH2: J9.6 U3.1
VEH3: J12.6 U4.1
VEH4: J15.6 U5.1
VEH5: J18.6 U6.1

## Tracks (layer width: path | path; a pad name or v marks a point on that pad's centre or on a via)
3.3V  (via drill 0.3)
  Top 0.508: J2.2 v10.42,17.52 v10.41,17.53 | v33.53,16.51 J1.2 | U1.8 24,15.88 23.62,16.26 v23.62,17.02 | C1.1 14.39,12.79 v14.99,12.19
  Bottom 0.508: v10.41,17.53 10.92,17.02 14.99,17.02 | 14.99,17.02 JP1.2 v23.62,17.02 25.15,18.54 27.69,18.54 | 27.69,18.54 33.02,18.54 33.53,18.03 v33.53,16.51 | 27.69,18.54 27.69,17.03 JP3.2 JP2.2 | 14.99,17.02 v14.99,12.19 15.75,11.43 17.27,11.43 18.29,10.41 J3.2
3.3V1  (via drill 0.3)
  Top 0.508: J5.2 41.41,17.52 v41.4,17.53 | v64.52,16.51 J4.2 | U2.8 54.99,15.88 54.61,16.26 v54.61,17.02 | C4.1 45.38,12.79 v45.97,12.19
  Bottom 0.508: v41.4,17.53 41.91,17.02 45.97,17.02 | 45.97,17.02 JP4.2 v54.61,17.02 56.13,18.54 58.67,18.54 | 58.67,18.54 64.01,18.54 64.52,18.03 v64.52,16.51 | 58.67,18.54 58.67,17.03 JP5.2 JP6.2 | 45.97,17.02 v45.97,12.19 46.74,11.43 48.26,11.43 49.28,10.41 J6.2
3.3V2  (via drill 0.3)
  Top 0.508: J8.2 v72.4,17.52 v72.39,17.53 | v95.5,16.51 J7.2 | U3.8 85.98,15.88 85.6,16.26 v85.6,17.02 | C6.1 76.37,12.79 v76.96,12.19
  Bottom 0.508: v72.39,17.53 72.9,17.02 76.96,17.02 | 76.96,17.02 JP7.2 v85.6,17.02 87.12,18.54 89.66,18.54 | 89.66,18.54 95,18.54 95.5,18.03 v95.5,16.51 | 89.66,18.54 89.66,17.03 JP8.2 JP9.2 | 76.96,17.02 v76.96,12.19 77.72,11.43 79.25,11.43 80.26,10.41 J9.2
3.3V3  (via drill 0.3)
  Top 0.508: J11.2 10.42,62.48 v10.41,62.48 | v33.53,61.47 J10.2 | U4.8 24,60.83 23.62,61.21 v23.62,61.98 | C8.1 14.39,57.75 v14.99,57.15
  Bottom 0.508: v10.41,62.48 10.92,61.98 14.99,61.98 | 14.99,61.98 JP10.2 v23.62,61.98 25.15,63.5 27.69,63.5 | 27.69,63.5 33.02,63.5 33.53,62.99 v33.53,61.47 | 27.69,63.5 27.69,61.99 JP11.2 JP12.2 | 14.99,61.98 v14.99,57.15 15.75,56.39 17.27,56.39 18.29,55.37 J12.2
3.3V4  (via drill 0.3)
  Top 0.508: J14.2 41.41,62.48 v41.4,62.48 | v64.52,61.47 J13.2 | U5.8 54.99,60.83 54.61,61.21 v54.61,61.98 | C10.1 45.38,57.75 v45.97,57.15
  Bottom 0.508: v41.4,62.48 41.91,61.98 45.97,61.98 | 45.97,61.98 JP13.2 v54.61,61.98 56.13,63.5 58.67,63.5 | 58.67,63.5 64.01,63.5 64.52,62.99 v64.52,61.47 | 58.67,63.5 58.67,61.99 JP14.2 JP15.2 | 45.97,61.98 v45.97,57.15 46.74,56.39 48.26,56.39 49.28,55.37 J15.2
3.3V5  (via drill 0.3)
  Top 0.508: J17.2 72.4,62.48 v72.39,62.48 | v95.5,61.47 J16.2 | U6.8 85.98,60.83 85.6,61.21 v85.6,61.98 | C12.1 76.37,57.75 v76.96,57.15
  Bottom 0.508: v72.39,62.48 72.9,61.98 76.96,61.98 | 76.96,61.98 JP16.2 v85.6,61.98 87.12,63.5 89.66,63.5 | 89.66,63.5 95,63.5 95.5,62.99 v95.5,61.47 | 89.66,63.5 89.66,61.99 JP17.2 JP18.2 | 76.96,61.98 v76.96,57.15 77.72,56.39 79.25,56.39 80.26,55.37 J18.2
!GPO!
  Top 0.254: U1.7 22.73,12.06 23.11,11.68 26.42,11.68 | J3.5 25.91,9.91 26.42,10.41 26.42,11.68 | 26.42,11.68 26.42,14.39 R4.1
!GPO!1
  Top 0.254: U2.7 53.72,12.06 54.1,11.68 57.4,11.68 | J6.5 56.9,9.91 57.4,10.41 57.4,11.68 | 57.4,11.68 57.4,14.39 R8.1
!GPO!2
  Top 0.254: U3.7 84.71,12.06 85.09,11.68 88.39,11.68 | J9.5 87.88,9.91 88.39,10.41 88.39,11.68 | 88.39,11.68 88.39,14.39 R12.1
!GPO!3
  Top 0.254: U4.7 22.73,57.02 23.11,56.64 26.42,56.64 | J12.5 25.91,54.86 26.42,55.37 26.42,56.64 | 26.42,56.64 26.42,59.35 R16.1
!GPO!4
  Top 0.254: U5.7 53.72,57.02 54.1,56.64 57.4,56.64 | J15.5 56.9,54.86 57.4,55.37 57.4,56.64 | 57.4,56.64 57.4,59.35 R20.1
!GPO!5
  Top 0.254: U6.7 84.71,57.02 85.09,56.64 88.39,56.64 | J18.5 87.88,54.86 88.39,55.37 88.39,56.64 | 88.39,56.64 88.39,59.35 R24.1
AC0  (via drill 0.3)
  Top 0.254: U1.2 22.73,20.95 22.95,21.17 C2.2 22.95,24.22 v23.37,24.64
  Bottom 0.254: v23.37,24.64 23.37,28.96 22.61,29.72 L1.IN1
AC1
  Top 0.254: L1.IN2 21.59,24.13 21.25,23.79 C2.1 21.25,21.17 21.46,20.95 U1.3
AC2  (via drill 0.3)
  Top 0.254: U2.2 53.72,20.95 53.94,21.17 C3.2 53.94,24.22 v54.36,24.64
  Bottom 0.254: v54.36,24.64 54.36,28.96 53.59,29.72 L2.IN1
AC3
  Top 0.254: L2.IN2 52.58,24.13 52.24,23.79 C3.1 52.24,21.17 52.45,20.95 U2.3
AC4  (via drill 0.3)
  Top 0.254: U3.2 84.71,20.95 84.92,21.17 C5.2 84.92,24.22 v85.34,24.64
  Bottom 0.254: v85.34,24.64 85.34,28.96 84.58,29.72 L3.IN1
AC5
  Top 0.254: L3.IN2 83.57,24.13 83.22,23.79 C5.1 83.22,21.17 83.44,20.95 U3.3
AC6  (via drill 0.3)
  Top 0.254: U4.2 22.73,65.91 22.95,66.13 C7.2 22.95,69.18 v23.37,69.6
  Bottom 0.254: v23.37,69.6 23.37,73.91 22.61,74.68 L4.IN1
AC7
  Top 0.254: L4.IN2 21.59,69.09 21.25,68.75 C7.1 21.25,66.13 21.46,65.91 U4.3
AC8  (via drill 0.3)
  Top 0.254: U5.2 53.72,65.91 53.94,66.13 C9.2 53.94,69.18 v54.36,69.6
  Bottom 0.254: v54.36,69.6 54.36,73.91 53.59,74.68 L5.IN1
AC9
  Top 0.254: L5.IN2 52.58,69.09 52.24,68.75 C9.1 52.24,66.13 52.45,65.91 U5.3
AC10  (via drill 0.3)
  Top 0.254: U6.2 84.71,65.91 84.92,66.13 C11.2 84.92,69.18 v85.34,69.6
  Bottom 0.254: v85.34,69.6 85.34,73.91 84.58,74.68 L6.IN1
AC11
  Top 0.254: L6.IN2 83.57,69.09 83.22,68.75 C11.1 83.22,66.13 83.44,65.91 U6.3
GND  (via drill 0.3)  (28 unrouted)
  other vias: 9.4,18.29 9.4,17.02 9.4,15.75 13.21,9.4 13.21,8.13 14.48,22.1 15.75,22.1 17.02,22.1 24.64,22.1 25.91,22.1 27.18,22.1 30.99,8.13 32.26,8.13 30.99,9.4 36.07,18.29 36.07,17.02 36.07,15.75 33.53,11.94 36.07,11.94 34.8,11.94 8.13,11.94 10.67,11.94 9.4,11.94
  pour Top (isolate 0.254): 6.86,6.86 6.86,23.62 37.34,23.62 37.34,6.86
  pour Bottom (isolate 0.254): 6.86,23.62 37.34,23.62 37.34,6.86 6.86,6.86
GND1  (via drill 0.3)  (28 unrouted)
  other vias: 40.39,18.29 40.39,17.02 40.39,15.75 44.2,9.4 44.2,8.13 45.47,22.1 46.74,22.1 48.01,22.1 55.63,22.1 56.9,22.1 58.17,22.1 61.98,8.13 63.25,8.13 61.98,9.4 67.06,18.29 67.06,17.02 67.06,15.75 64.52,11.94 67.06,11.94 65.79,11.94 39.12,11.94 41.66,11.94 40.39,11.94
  pour Top (isolate 0.254): 37.85,6.86 37.85,23.62 68.33,23.62 68.33,6.86
  pour Bottom (isolate 0.254): 37.85,23.62 68.33,23.62 68.33,6.86 37.85,6.86
GND2  (via drill 0.3)  (28 unrouted)
  other vias: 71.37,18.29 71.37,17.02 71.37,15.75 75.18,9.4 75.18,8.13 76.45,22.1 77.72,22.1 78.99,22.1 86.61,22.1 87.88,22.1 89.15,22.1 92.96,8.13 94.23,8.13 92.96,9.4 98.04,18.29 98.04,17.02 98.04,15.75 95.5,11.94 98.04,11.94 96.77,11.94 70.1,11.94 72.64,11.94 71.37,11.94
  pour Top (isolate 0.254): 68.83,6.86 68.83,23.62 99.31,23.62 99.31,6.86
  pour Bottom (isolate 0.254): 68.83,23.62 99.31,23.62 99.31,6.86 68.83,6.86
GND3  (via drill 0.3)  (28 unrouted)
  other vias: 9.4,63.25 9.4,61.98 9.4,60.71 13.21,54.36 13.21,53.09 14.48,67.06 15.75,67.06 17.02,67.06 24.64,67.06 25.91,67.06 27.18,67.06 30.99,53.09 32.26,53.09 30.99,54.36 36.07,63.25 36.07,61.98 36.07,60.71 33.53,56.9 36.07,56.9 34.8,56.9 8.13,56.9 10.67,56.9 9.4,56.9
  pour Top (isolate 0.254): 6.86,51.82 6.86,68.58 37.34,68.58 37.34,51.82
  pour Bottom (isolate 0.254): 6.86,68.58 37.34,68.58 37.34,51.82 6.86,51.82
GND4  (via drill 0.3)  (28 unrouted)
  other vias: 40.39,63.25 40.39,61.98 40.39,60.71 44.2,54.36 44.2,53.09 45.47,67.06 46.74,67.06 48.01,67.06 55.63,67.06 56.9,67.06 58.17,67.06 61.98,53.09 63.25,53.09 61.98,54.36 67.06,63.25 67.06,61.98 67.06,60.71 64.52,56.9 67.06,56.9 65.79,56.9 39.12,56.9 41.66,56.9 40.39,56.9
  pour Top (isolate 0.254): 37.85,51.82 37.85,68.58 68.33,68.58 68.33,51.82
  pour Bottom (isolate 0.254): 37.85,68.58 68.33,68.58 68.33,51.82 37.85,51.82
GND5  (via drill 0.3)  (28 unrouted)
  other vias: 71.37,63.25 71.37,61.98 71.37,60.71 75.18,54.36 75.18,53.09 76.45,67.06 77.72,67.06 78.99,67.06 86.61,67.06 87.88,67.06 89.15,67.06 92.96,53.09 94.23,53.09 92.96,54.36 98.04,63.25 98.04,61.98 98.04,60.71 95.5,56.9 98.04,56.9 96.77,56.9 70.1,56.9 72.64,56.9 71.37,56.9
  pour Top (isolate 0.254): 68.83,51.82 68.83,68.58 99.31,68.58 99.31,51.82
  pour Bottom (isolate 0.254): 68.83,68.58 99.31,68.58 99.31,51.82 68.83,51.82
N$1  (via drill 0.3)
  Top 0.254: v25.15,17.02 R3.2
  Bottom 0.254: JP3.1 v25.15,17.02
N$2  (via drill 0.3)
  Top 0.254: R1.2 15.24,17.02 14.99,17.27 v14.99,18.03
  Bottom 0.254: v14.99,18.03 15.01,18.06 JP1.3
N$3  (via drill 0.3)
  Top 0.254: R2.2 17.87,13.3 17.78,13.21 v17.02,13.21
  Bottom 0.254: JP1.1 v17.02,13.21
N$4
  Top 0.254: R3.1 28.03,18.12 28.84,18.93 D1.A
N$5  (via drill 0.3)
  Top 0.254: v29.21,13.21 29.21,14.22 28.96,14.48 R4.2
  Bottom 0.254: JP2.1 26.66,13.47 26.92,13.21 v29.21,13.21
N$6  (via drill 0.3)
  Top 0.254: R5.2 46.23,17.02 45.97,17.27 v45.97,18.03
  Bottom 0.254: v45.97,18.03 46,18.06 JP4.3
N$7  (via drill 0.3)
  Top 0.254: R6.2 48.86,13.3 48.77,13.21 v48.01,13.21
  Bottom 0.254: JP4.1 v48.01,13.21
N$8  (via drill 0.3)
  Top 0.254: v56.13,17.02 R7.2
  Bottom 0.254: JP5.1 v56.13,17.02
N$9
  Top 0.254: R7.1 59.02,18.12 59.83,18.93 D2.A
N$10  (via drill 0.3)
  Top 0.254: v60.2,13.21 60.2,14.22 59.94,14.48 R8.2
  Bottom 0.254: JP6.1 57.64,13.47 57.91,13.21 v60.2,13.21
N$11  (via drill 0.3)
  Top 0.254: R9.2 77.22,17.02 76.96,17.27 v76.96,18.03
  Bottom 0.254: v76.96,18.03 76.99,18.06 JP7.3
N$12  (via drill 0.3)
  Top 0.254: R10.2 79.84,13.3 79.76,13.21 v78.99,13.21
  Bottom 0.254: JP7.1 v78.99,13.21
N$13  (via drill 0.3)
  Top 0.254: v87.12,17.02 R11.2
  Bottom 0.254: JP8.1 v87.12,17.02
N$14
  Top 0.254: R11.1 90,18.12 90.82,18.93 D3.A
N$15  (via drill 0.3)
  Top 0.254: v91.19,13.21 91.19,14.22 90.93,14.48 R12.2
  Bottom 0.254: JP9.1 88.63,13.47 88.9,13.21 v91.19,13.21
N$16  (via drill 0.3)
  Top 0.254: R13.2 15.24,61.98 14.99,62.23 v14.99,62.99
  Bottom 0.254: v14.99,62.99 15.01,63.02 JP10.3
N$17  (via drill 0.3)
  Top 0.254: R14.2 17.87,58.25 17.78,58.17 v17.02,58.17
  Bottom 0.254: JP10.1 v17.02,58.17
N$18  (via drill 0.3)
  Top 0.254: v25.15,61.98 R15.2
  Bottom 0.254: JP11.1 v25.15,61.98
N$19
  Top 0.254: R15.1 28.03,63.08 28.84,63.89 D4.A
N$20  (via drill 0.3)
  Top 0.254: v29.21,58.17 29.21,59.18 28.96,59.44 R16.2
  Bottom 0.254: JP12.1 26.66,58.43 26.92,58.17 v29.21,58.17
N$21  (via drill 0.3)
  Top 0.254: R17.2 46.23,61.98 45.97,62.23 v45.97,62.99
  Bottom 0.254: v45.97,62.99 46,63.02 JP13.3
N$22  (via drill 0.3)
  Top 0.254: R18.2 48.86,58.25 48.77,58.17 v48.01,58.17
  Bottom 0.254: JP13.1 v48.01,58.17
N$23  (via drill 0.3)
  Top 0.254: v56.13,61.98 R19.2
  Bottom 0.254: JP14.1 v56.13,61.98
N$24
  Top 0.254: R19.1 59.02,63.08 59.83,63.89 D5.A
N$25  (via drill 0.3)
  Top 0.254: v60.2,58.17 60.2,59.18 59.94,59.44 R20.2
  Bottom 0.254: JP15.1 57.64,58.43 57.91,58.17 v60.2,58.17
N$26  (via drill 0.3)
  Top 0.254: R21.2 77.22,61.98 76.96,62.23 v76.96,62.99
  Bottom 0.254: v76.96,62.99 76.99,63.02 JP16.3
N$27  (via drill 0.3)
  Top 0.254: R22.2 79.84,58.25 79.76,58.17 v78.99,58.17
  Bottom 0.254: JP16.1 v78.99,58.17
N$28  (via drill 0.3)
  Top 0.254: v87.12,61.98 R23.2
  Bottom 0.254: JP17.1 v87.12,61.98
N$29
  Top 0.254: R23.1 90,63.08 90.82,63.89 D6.A
N$30  (via drill 0.3)
  Top 0.254: v91.19,58.17 91.19,59.18 90.93,59.44 R24.2
  Bottom 0.254: JP18.1 88.63,58.43 88.9,58.17 v91.19,58.17
SCL  (via drill 0.3)
  Top 0.254: J3.4 23.37,9.91 22.86,10.41 21.84,10.41 21.46,10.79 U1.6 21.46,15.37 v21.08,15.75 | v25.15,15.75 29.46,15.75 29.97,16.26 29.97,18.03 30.48,18.54 32.23,18.54 J1.4 | J2.4 14.76,15.52 14.99,15.75 16.13,15.75 | 16.13,15.75 v19.3,15.75 | R2.1 16.17,15.71 16.13,15.75
  Bottom 0.254: v19.3,15.75 v21.08,15.75 v25.15,15.75
SCL1  (via drill 0.3)
  Top 0.254: J6.4 54.36,9.91 53.85,10.41 52.83,10.41 52.45,10.79 U2.6 52.45,15.37 v52.07,15.75 | v56.13,15.75 60.45,15.75 60.96,16.26 60.96,18.03 61.47,18.54 63.22,18.54 J4.4 | J5.4 45.74,15.52 45.97,15.75 47.12,15.75 | 47.12,15.75 v50.29,15.75 | R6.1 47.16,15.71 47.12,15.75
  Bottom 0.254: v50.29,15.75 v52.07,15.75 v56.13,15.75
SCL2  (via drill 0.3)
  Top 0.254: J9.4 85.34,9.91 84.84,10.41 83.82,10.41 83.44,10.79 U3.6 83.44,15.37 v83.06,15.75 | v87.12,15.75 91.44,15.75 91.95,16.26 91.95,18.03 92.46,18.54 94.21,18.54 J7.4 | J8.4 76.73,15.52 76.96,15.75 78.11,15.75 | 78.11,15.75 v81.28,15.75 | R10.1 78.14,15.71 78.11,15.75
  Bottom 0.254: v81.28,15.75 v83.06,15.75 v87.12,15.75
SCL3  (via drill 0.3)
  Top 0.254: J12.4 23.37,54.86 22.86,55.37 21.84,55.37 21.46,55.75 U4.6 21.46,60.32 v21.08,60.71 | v25.15,60.71 29.46,60.71 29.97,61.21 29.97,62.99 30.48,63.5 32.23,63.5 J10.4 | J11.4 14.76,60.48 14.99,60.71 16.13,60.71 | 16.13,60.71 v19.3,60.71 | R14.1 16.17,60.67 16.13,60.71
  Bottom 0.254: v19.3,60.71 v21.08,60.71 v25.15,60.71
SCL4  (via drill 0.3)
  Top 0.254: J15.4 54.36,54.86 53.85,55.37 52.83,55.37 52.45,55.75 U5.6 52.45,60.32 v52.07,60.71 | v56.13,60.71 60.45,60.71 60.96,61.21 60.96,62.99 61.47,63.5 63.22,63.5 J13.4 | J14.4 45.74,60.48 45.97,60.71 47.12,60.71 | 47.12,60.71 v50.29,60.71 | R18.1 47.16,60.67 47.12,60.71
  Bottom 0.254: v50.29,60.71 v52.07,60.71 v56.13,60.71
SCL5  (via drill 0.3)
  Top 0.254: J18.4 85.34,54.86 84.84,55.37 83.82,55.37 83.44,55.75 U6.6 83.44,60.32 v83.06,60.71 | v87.12,60.71 91.44,60.71 91.95,61.21 91.95,62.99 92.46,63.5 94.21,63.5 J16.4 | J17.4 76.73,60.48 76.96,60.71 78.11,60.71 | 78.11,60.71 v81.28,60.71 | R22.1 78.14,60.67 78.11,60.71
  Bottom 0.254: v81.28,60.71 v83.06,60.71 v87.12,60.71
SDA  (via drill 0.3)
  Top 0.254: J3.3 20.83,10.16 20.19,10.79 v20.19,12.45 U1.5 20.19,16.38 19.56,17.02 R1.1 17.87,18.71 17.27,19.3 14.22,19.3 13.72,18.8 13.72,17.02 13.22,16.52 J2.3 | J1.3 30.98,17.52 30.73,17.27 30.73,12.95 v30.23,12.45
  Bottom 0.254: v30.23,12.45 v20.19,12.45
SDA1  (via drill 0.3)
  Top 0.254: J6.3 51.82,10.16 51.18,10.79 v51.18,12.45 U2.5 51.18,16.38 50.55,17.02 R5.1 48.86,18.71 48.26,19.3 45.21,19.3 44.7,18.8 44.7,17.02 44.2,16.52 J5.3 | J4.3 61.97,17.52 61.72,17.27 61.72,12.95 v61.21,12.45
  Bottom 0.254: v61.21,12.45 v51.18,12.45
SDA2  (via drill 0.3)
  Top 0.254: J9.3 82.8,10.16 82.17,10.79 v82.17,12.45 U3.5 82.17,16.38 81.53,17.02 R9.1 79.84,18.71 79.25,19.3 76.2,19.3 75.69,18.8 75.69,17.02 75.19,16.52 J8.3 | J7.3 92.96,17.52 92.71,17.27 92.71,12.95 v92.2,12.45
  Bottom 0.254: v92.2,12.45 v82.17,12.45
SDA3  (via drill 0.3)
  Top 0.254: J12.3 20.83,55.12 20.19,55.75 v20.19,57.4 U4.5 20.19,61.34 19.56,61.98 R13.1 17.87,63.67 17.27,64.26 14.22,64.26 13.72,63.75 13.72,61.98 13.22,61.48 J11.3 | J10.3 30.98,62.48 30.73,62.23 30.73,57.91 v30.23,57.4
  Bottom 0.254: v30.23,57.4 v20.19,57.4
SDA4  (via drill 0.3)
  Top 0.254: J15.3 51.82,55.12 51.18,55.75 v51.18,57.4 U5.5 51.18,61.34 50.55,61.98 R17.1 48.86,63.67 48.26,64.26 45.21,64.26 44.7,63.75 44.7,61.98 44.2,61.48 J14.3 | J13.3 61.97,62.48 61.72,62.23 61.72,57.91 v61.21,57.4
  Bottom 0.254: v61.21,57.4 v51.18,57.4
SDA5  (via drill 0.3)
  Top 0.254: J18.3 82.8,55.12 82.17,55.75 v82.17,57.4 U6.5 82.17,61.34 81.53,61.98 R21.1 79.84,63.67 79.25,64.26 76.2,64.26 75.69,63.75 75.69,61.98 75.19,61.48 J17.3 | J16.3 92.96,62.48 92.71,62.23 92.71,57.91 v92.2,57.4
  Bottom 0.254: v92.2,57.4 v82.17,57.4
VEH  (via drill 0.3)
  Top 0.254: U1.1 v27.17,19.82 v27.18,19.81
  Bottom 0.254: v27.18,19.81 34.04,19.81 34.54,19.3 34.54,15.75 34.04,15.24 32,15.24 31.5,14.73 31.5,12.19 30.48,11.18 28.96,11.18 28.45,10.67 J3.6
VEH1  (via drill 0.3)
  Top 0.254: U2.1 v58.16,19.82 v58.17,19.81
  Bottom 0.254: v58.17,19.81 65.02,19.81 65.53,19.3 65.53,15.75 65.02,15.24 62.99,15.24 62.48,14.73 62.48,12.19 61.47,11.18 59.94,11.18 59.44,10.67 J6.6
VEH2  (via drill 0.3)
  Top 0.254: U3.1 v89.15,19.82 v89.15,19.81
  Bottom 0.254: v89.15,19.81 96.01,19.81 96.52,19.3 96.52,15.75 96.01,15.24 93.98,15.24 93.47,14.73 93.47,12.19 92.46,11.18 90.93,11.18 90.42,10.67 J9.6
VEH3  (via drill 0.3)
  Top 0.254: U4.1 v27.17,64.78 v27.18,64.77
  Bottom 0.254: v27.18,64.77 34.04,64.77 34.54,64.26 34.54,60.71 34.04,60.2 32,60.2 31.5,59.69 31.5,57.15 30.48,56.13 28.96,56.13 28.45,55.63 J12.6
VEH4  (via drill 0.3)
  Top 0.254: U5.1 v58.16,64.78 v58.17,64.77
  Bottom 0.254: v58.17,64.77 65.02,64.77 65.53,64.26 65.53,60.71 65.02,60.2 62.99,60.2 62.48,59.69 62.48,57.15 61.47,56.13 59.94,56.13 59.44,55.63 J15.6
VEH5  (via drill 0.3)
  Top 0.254: U6.1 v89.15,64.78 v89.15,64.77
  Bottom 0.254: v89.15,64.77 96.01,64.77 96.52,64.26 96.52,60.71 96.01,60.2 93.98,60.2 93.47,59.69 93.47,57.15 92.46,56.13 90.93,56.13 90.42,55.63 J18.6

## Text on the board
Bottom: X02 | X02 | X02 | X02 | X02 | X02
Milling: v-score | v-score | v-score | v-score | v-score | v-score | v-score